# Altium PCB PCB1.PcbDoc (part 1 of 2)
Units mm, origin at the board's own origin, x right, y up, seen from the top; angles counter-clockwise.
Board outline 55 x 45 mm, 2 copper layers (Top Layer, Bottom Layer); 82 components, 65 nets, 333 pads, 91 vias.
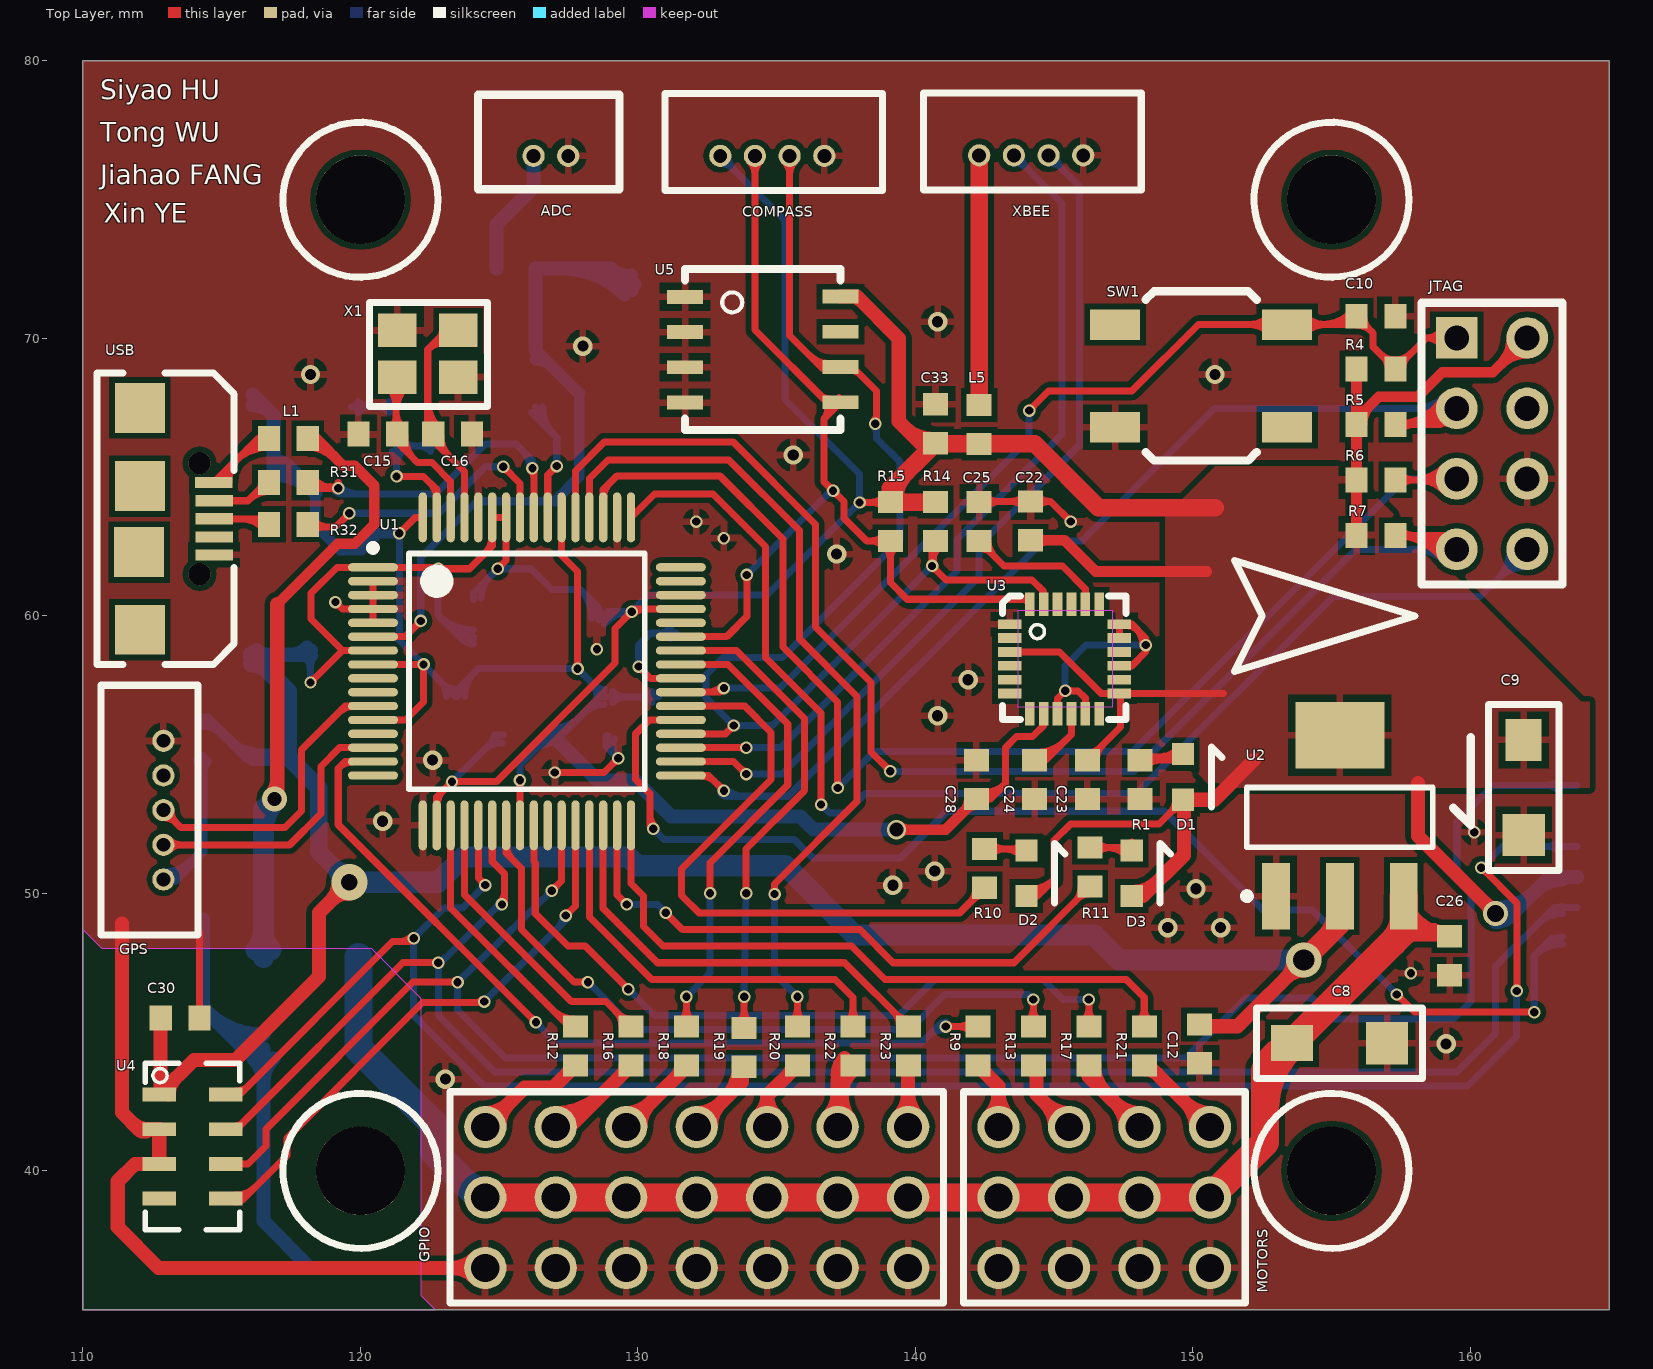
[diagram p0: Top Layer view]
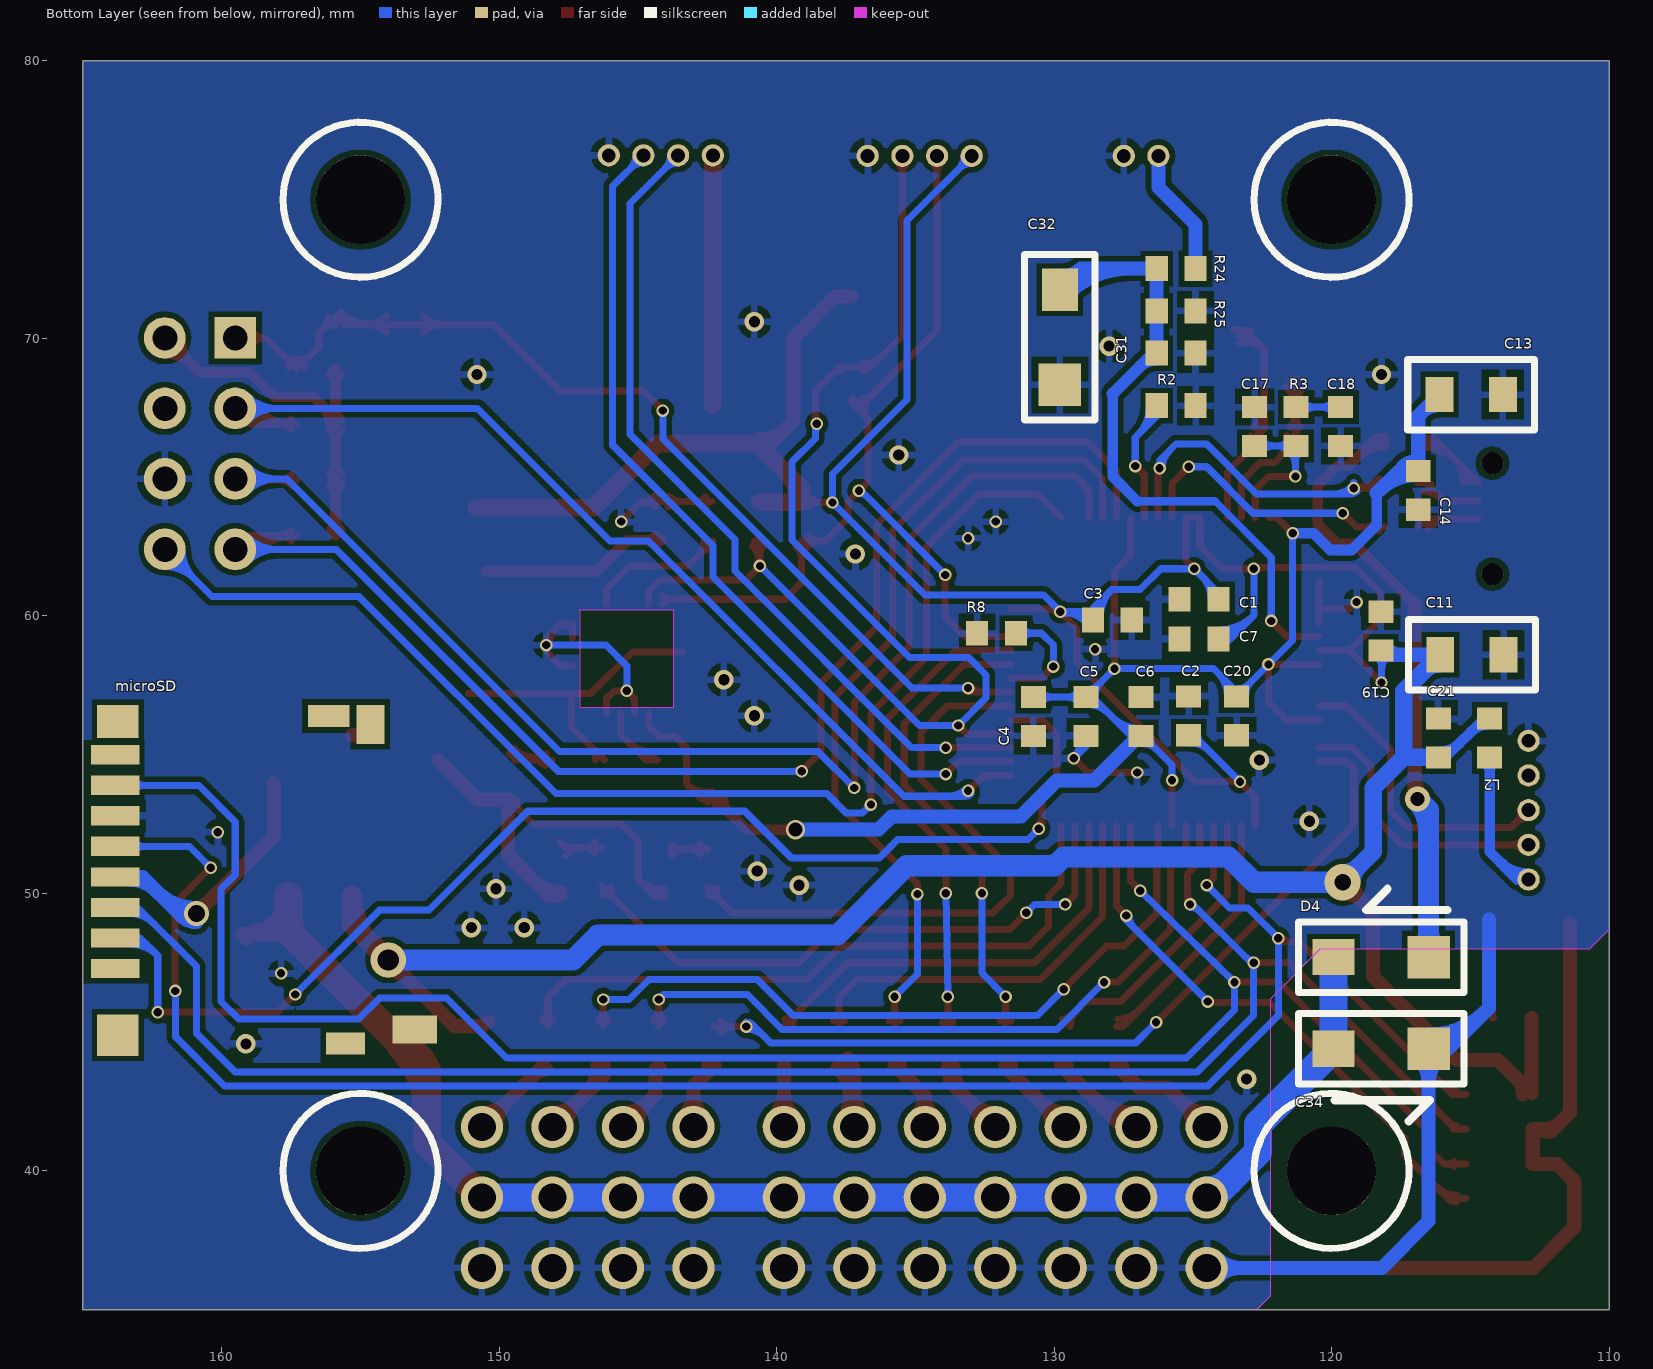
[diagram p1: Bottom Layer view, seen from below]

## Layer stack, top to bottom
Top Solder: solder mask 0.0102, Solder Resist, Dk 3.5
Top Layer: signal copper 0.0356
Dielectric 1: dielectric 0.32, FR-4, Dk 4.8
Bottom Layer: signal copper 0.0356
Bottom Solder: solder mask 0.0102, Solder Resist, Dk 3.5

## Board outline
110,35 110,80 165,80 165,35

## Design rules (kind name [scope] priority, off if disabled: settings)
Clearance [All] p1: gap=0.2
PlaneClearance [All] p1: clearance=0.1
PlaneConnect [All] p1: planeconnectstyle=Relief reliefexpansion=0.508 reliefentries=4 reliefconductorwidth=0.5 reliefairgap=0.254
PolygonConnect [All] p1: connectstyle=Relief reliefconductorwidth=0.254 reliefentries=4 polygonreliefangle="90 Angle" airgapwidth=0.254
RoutingVias [All] p1: holewidth=0.711 width=1.27 viastyle="Through Hole" minholewidth=0.711 minwidth=1.27 maxholewidth=0.711 maxwidth=1.27
SolderMaskExpansion [All] p1: expansion=0.102
Width [All] p1: maxlimit=1.27 minlimit=0.254 preferedwidth=0.254
27 further rules are at their usual default settings.

## Components (designator, comment, footprint, x,y, rotation, side; value= is the part's Value field where it differs from the comment)
ADC "AD_Port" AD 126.238,76.581 r0 top (schematic designator P10)
C1 "0.1u" 1608[0603] 124.775,60.6 r180 bottom
C2 "0.1u" 1608[0603] 125.15,56.4 r270 bottom
C3 "0.1u" 1608[0603] 127.9,59.85 r0 bottom
C4 "0.1u" 1608[0603] 130.75,56.375 r90 bottom
C5 "0.1u" 1608[0603] 128.85,56.375 r90 bottom
C6 "0.1u" 1608[0603] 126.875,56.375 r270 bottom
C7 "0.1u" 1608[0603] 124.775,59.175 r180 bottom
C8 "10u" 1206 157,44.6 r180 top
C9 "10u" 1206 161.925,52.1 r90 top
C10 "0.01u" 1608[0603] 156.6,70.8 r180 top
C11 "2.2u" 0805 113.8,58.6 r0 bottom
C12 "1n" 1608[0603] 150.241,44.577 r90 top
C13 "4.7u" 0805 113.825,67.975 r0 bottom
C14 "0.1u" 1608[0603] 116.875,64.525 r90 bottom
C15 "8p" 1608[0603] 120.625,66.55 r0 top
C16 "8p" 1608[0603] 123.325,66.55 r180 top
C17 "1n" 1608[0603] 122.775,66.825 r270 bottom
C18 "10n" 1608[0603] 119.675,66.825 r90 bottom
C19 "0.1u" 1608[0603] 118.225,59.45 r270 bottom
C20 "0.1u" 1608[0603] 123.425,56.4 r90 bottom
C21 "1u" 1608[0603] 116.15,55.6 r270 bottom
C22 "1u" 1608[0603] 144.15,63.425 r270 top
C23 "0.1u" 1608[0603] 146.2,54.1 r90 top
C24 "0.1u" 1608[0603] 144.3,54.1 r90 top
C25 "2.2n" 1608[0603] 142.3,63.4 r270 top
C26 "0.1u" 1608[0603] 159.258,47.752 r90 top
C28 "10n" 1608[0603] 142.2,54.1 r270 top
C30 "100n" 1608[0603] 113.5,45.5 r180 top
C31 "0.1u" 1608[0603] 125.603,69.469 r0 bottom
C32 "10u" 1206 129.794,68.326 r90 bottom
C33 "1u" 1608[0603] 140.725,66.925 r270 top
C34 "10u" 1206 116.5,44.4 r0 bottom
COMPASS "COMPASS" Compass 132.969,76.581 r0 top (schematic designator P4)
D1 "LED" LED 149.65,53.375 r90 top
D2 "LED" LED 144,49.9 r90 top
D3 "LED" LED 147.8,49.9 r90 top
D4 "Diode" 1206 116.5,47.7 r0 bottom
GPIO "3*7 PWMin" HEADER3X7 124.5,36.5 r0 top (schematic designator P6)
GPS "GPS" "new GPS 1.25x5" 112.9,50.5 r90 top (schematic designator P3)
JTAG "JTAG" JTAG2 159.512,70.02 r0 top (schematic designator P5)
L1 "Ferrite" 1608[0603] 117.4,66.4 r0 top
L2 "Ferrite" 1608[0603] 114.3,55.6 r90 bottom
L5 "Ferrite" 1608[0603] 142.3,66.9 r270 top
microSD "SD Connector" SD_Connector 162.941,54.991 r90 bottom (schematic designator P6)
MOTORS "3*4P PWMout" header3x4 143,36.5 r0 top (schematic designator P7)
R1 "1K" 1608[0603] 148.1,54.1 r90 top
R2 "10K" 1608[0603] 125.6,67.575 r0 bottom
R3 "1.5K" 1608[0603] 121.275,66.825 r270 bottom
R4 "47K" 1608[0603] 156.6,68.9 r180 top
R5 "10K" 1608[0603] 156.6,66.9 r180 top
R6 "10K" 1608[0603] 156.6,64.9 r180 top
R7 "10K" 1608[0603] 156.6,62.9 r180 top
R8 "10K" 1608[0603] 132.075,59.375 r180 bottom
R9 "1K" 1608[0603] 142.25,44.5 r270 top
R10 "270R" 1608[0603] 142.5,50.9 r90 top
R11 "270R" 1608[0603] 146.3,50.95 r90 top
R12 "220" 1608[0603] 127.75,44.5 r270 top
R13 "1K" 1608[0603] 144.25,44.5 r270 top
R14 "47K" 1608[0603] 140.725,63.4 r270 top
R15 "47K" 1608[0603] 139.1,63.4 r270 top
R16 "220" 1608[0603] 129.75,44.5 r270 top
R17 "1K" 1608[0603] 146.25,44.5 r270 top
R18 "220" 1608[0603] 131.75,44.5 r270 top
R19 "220" 1608[0603] 133.83,44.45 r270 top
R20 "220" 1608[0603] 135.75,44.5 r270 top
R21 "1K" 1608[0603] 148.25,44.5 r270 top
R22 "220" 1608[0603] 137.75,44.5 r270 top
R23 "220" 1608[0603] 139.75,44.5 r270 top
R24 "200K" 1608[0603] 125.603,72.517 r180 bottom
R25 "470K" 1608[0603] 125.603,70.993 r0 bottom
R31 "22R" 1608[0603] 117.4,64.8 r0 top
R32 "22R" 1608[0603] 117.4,63.3 r0 top
SW1 "Push Button" switch 154.3,71 r180 top
U1 "AT91SAM7S256-AU-001" LQFP64_N 126,58 r0 top
U2 "LM1117N33" SOT230P700X180-4N 155.3,52.8 r90 top
U3 "MPU9150" LGANEW 143.4,59.7 r0 top
U4 "MS5611" MS_5611 112.75,42.75 r0 top
U5 "EEPROM" EEPROM 131.7,71.5 r270 top
USB "USB_Receptacle" micro_usb 114.2,61.5 r0 top (schematic designator P1)
X1 "" OSC2 121.325,70.3 r0 top
XBEE "XBEE" Compass 142.3,76.6 r0 top (schematic designator P2)

## Footprints (in the part's own frame and the unit in brackets; to place one, negate y for a bottom-side part, rotate by r counter-clockwise, add the part's x,y. Pads: shape width x height; smd on the part's side, far side on the other; paste and mask are expansions set on the pad)
0805 [mm]
  rect 1x1.27 smd: 1(0,0) 2(2.286,0)
  silkscreen extent -1.14,-1.27 3.43,1.27
1206 [mil]
  rect 60x60 smd: 1(0,0)
  rect 60x51.18 smd: 2(135,0)
  silkscreen extent -50,-50 185,50
1608[0603] [mm] "Chip Capacitor, Body 1.6x0.8mm, IPC High Density"
  rect 0.8x0.9 smd: 1(-0.7,0) 2(0.7,0)
  body extent -0.87,-0.48 0.87,0.48, height 1.3
AD [mm]
  round 0.8 hole 0.5: 1(0,0) 2(1.25,0)
  silkscreen extent -2,-1.2 3.1,2.2
Compass [mm]
  round 0.8 hole 0.5: 1(0,0) 2(1.25,0) 3(2.5,0) 4(3.75,0)
  silkscreen extent -2,-1.25 5.84,2.25
EEPROM [mm]
  rect 0.5x1.3 smd: 1(0,0) 2(1.27,0) 3(2.54,0) 4(3.81,0) 5(3.8,5.6) 6(2.53,5.6) 7(1.26,5.6) 8(-0.01,5.6)
  silkscreen extent -1,0 4.8,5.6
header3x4 [mil]
  round 60 hole 40: 1(0,0) 2(0,100) 3(0,200) 4(100,0) 5(100,100) 6(100,200) 7(200,0) 8(200,100) 9(200,200) 10(300,0) 11(300,100) 12(300,200)
  silkscreen extent -50,-50 350,250
HEADER3X7 [mil]
  round 60 hole 40: 1(0,0) 2(0,100) 3(0,200) 4(100,0) 5(100,100) 6(100,200) 7(200,0) 8(200,100) 9(200,200) 10(300,0) 11(300,100) 12(300,200) 13(400,0) 14(400,100) 15(400,200) 16(500,0) 17(500,100) 18(500,200) 19(600,0) 20(600,100) 21(600,200)
  silkscreen extent -50,-50 650,250
JTAG2 [mm]
  rect 1.5x1.5 hole 0.9: 1(0,0)
  round 1.5 hole 0.9: 2(0,-2.54) 3(0,-5.08) 4(0,-7.62) 5(2.54,0) 6(2.54,-2.54) 7(2.54,-5.08) 8(2.54,-7.62)
  silkscreen extent -1.27,-8.89 3.81,1.27
LED [mm]
  rect 0.8x0.8 smd: 1(0,0) 2(1.65,0)
  silkscreen extent -0.25,-1.4 1.91,-1.02
LGANEW [mm]
  rect 0.85x0.35 smd mask+0: 1(0,0) 2(0,-0.5) 3(0,-1) 4(0,-1.5) 5(0,-2) 6(0,-2.5) 13(3.95,-2.5) 14(3.95,-2) 15(3.95,-1.5) 16(3.95,-1) 17(3.95,-0.5) 18(3.95,0)
  rect 0.35x0.85 smd mask+0: 7(0.725,-3.225) 8(1.225,-3.225) 9(1.725,-3.225) 10(2.225,-3.225) 11(2.725,-3.225) 12(3.225,-3.225) 19(3.225,0.725) 20(2.725,0.725) 21(2.225,0.725) 22(1.725,0.725) 23(1.225,0.725) 24(0.725,0.725)
  silkscreen extent -0.25,-3.43 4.19,1.02
LQFP64_N [mm] "Thin QFP, 64-Leads, Body 10x10mm, Pitch 0.5mm, IPC Medium Density"
  oval 1.8x0.3 smd: 1(-5.55,3.75) 2(-5.55,3.25) 3(-5.55,2.75) 4(-5.55,2.25) 5(-5.55,1.75) 6(-5.55,1.25) 7(-5.55,0.75) 8(-5.55,0.25) 9(-5.55,-0.25) 10(-5.55,-0.75) 11(-5.55,-1.25) 12(-5.55,-1.75) 13(-5.55,-2.25) 14(-5.55,-2.75) 15(-5.55,-3.25) 16(-5.55,-3.75) 33(5.55,-3.75) 34(5.55,-3.25) 35(5.55,-2.75) 36(5.55,-2.25) 37(5.55,-1.75) 38(5.55,-1.25) 39(5.55,-0.75) 40(5.55,-0.25) 41(5.55,0.25) 42(5.55,0.75) 43(5.55,1.25) 44(5.55,1.75) 45(5.55,2.25) 46(5.55,2.75) 47(5.55,3.25) 48(5.55,3.75)
  oval 0.3x1.8 smd: 17(-3.75,-5.55) 18(-3.25,-5.55) 19(-2.75,-5.55) 20(-2.25,-5.55) 21(-1.75,-5.55) 22(-1.25,-5.55) 23(-0.75,-5.55) 24(-0.25,-5.55) 25(0.25,-5.55) 26(0.75,-5.55) 27(1.25,-5.55) 28(1.75,-5.55) 29(2.25,-5.55) 30(2.75,-5.55) 31(3.25,-5.55) 32(3.75,-5.55) 49(3.75,5.55) 50(3.25,5.55) 51(2.75,5.55) 52(2.25,5.55) 53(1.75,5.55) 54(1.25,5.55) 55(0.75,5.55) 56(0.25,5.55) 57(-0.25,5.55) 58(-0.75,5.55) 59(-1.25,5.55) 60(-1.75,5.55) 61(-2.25,5.55) 62(-2.75,5.55) 63(-3.25,5.55) 64(-3.75,5.55)
  silkscreen extent -5.67,-4.25 4.25,4.57, body extent -5,-5 5,5, height 1.6
micro_usb [mm]
  rect 1.35x0.4 smd: 1(0.508,3.302) 2(0.525,2.65) 3(0.525,2) 4(0.525,1.35) 5(0.525,0.7)
  rect 1.8x1.8 smd: 6(-2.175,0.8) 6(-2.15,-2) 6(-2.15,3.175) 6(-2.15,6)
  round 0.8 hole 0.8: 18(0,0) 19(0,4)
  silkscreen extent -3.7,-3.25 1.25,7.25
MS_5611 [mm]
  rect 1.2x0.5 smd: 1(0,0) 2(0,-1.25) 3(0,-2.5) 4(0,-3.75) 5(2.4,-3.75) 6(2.4,-2.5) 7(2.4,-1.25) 8(2.4,0)
  silkscreen extent -0.5,-4.88 2.9,1.13
"new GPS 1.25x5" [mm]
  round 0.8 hole 0.5: 1(0,0) 2(1.25,0) 3(2.5,0) 4(5,0) 5(3.75,0)
  silkscreen extent -2,-1.25 7,2.25
OSC2 [mm]
  rect 1.4x1.2 smd: 1(0,-1.7) 2(2.2,-1.7) 3(2.2,0) 4(0,0)
  silkscreen extent -1,-2.75 3.25,1
SD_Connector [mm]
  rect 0.7x1.75 smd: 1(-6.6,0.9) 2(-5.5,0.9) 3(-4.4,0.9) 4(-3.3,0.9) 5(-2.2,0.9) 6(-1.1,0.9) 7(-7.7,0.9) 7(0,0.9)
  rect 0.8x1.4 smd: 7(-10.4,-7.4)
  rect 1.5x1.5 smd: 7(-10.1,0.8)
  rect 1x1.6 smd: 7(-9.9,-9.9)
  rect 1.4x1 smd: 7(1.1,-8.3)
  rect 1.2x1.5 smd: 7(1.2,0.8)
  rect 0.8x1.5 smd: 7(1.4,-6.8)
SOT230P700X180-4N [mm] "SOT223, 4-Leads, Body 6.50x7.00mm (avg), Pitch 2.30mm, IPC Medium Density"
  rect 2.4x1 smd: 1(-2.9,2.3) 2(-2.9,0) 3(-2.9,-2.3)
  rect 2.4x3.2 smd: 4(2.9,0)
  silkscreen extent -3.02,-3.35 1.02,3.47, body extent -1.85,-3.35 1.85,3.35, height 1.8
switch [mm]
  rect 1.8x1.1 smd: 1(0.9,4.2) 2(7.1,4.2) 3(0.9,0.5) 4(7.1,0.5)
  silkscreen extent 2,-0.7 6,5.4

## Part data
C1 C2 C3 C4 C5 C6 C7 C10 C12 C14 C15 C16 C17 C18 C19 C20 C21 C22 C23 C24 C25 C28 C30 C31 C33: library part "Cap 0603", "0603 Capacitor"
C8 C9 C26 C32 C34: library part "Cap 1206", "1206 Capacitor"
C11 C13: library part "Cap 0805", "0805 Capacitor"
COMPASS GPS XBEE: "Header, 4-Pin"
D1 D2 D3: "Typical RED, GREEN, YELLOW, AMBER GaAs LED"
D4: "Default Diode"
GPIO: library part MyPWMin
JTAG: library part JTAG2
L1: library part Inductor, "Inductor"
MOTORS: library part MyPWMout
R1 R2 R3 R4 R5 R6 R7 R8 R9 R10 R11 R12 R13 R14 R15 R16 R17 R18 R19 R20 R21 R22 R23 R24 R25 R31 R32: library part "Res 0603", "Resistor"
U1: "AT91 ARM Thumb-based 32-bit Microcontroller, 256KB Flash, 64KB SRAM, 64-Pin LQFP, 11-ch. PDC, Industrial Grade (-40癈 to 85癈), Pb-Free"
U2: library part LM1117S33, "3.3V Regulator"
U5: library part ROM
X1: library part OSC2

## Free pads (board coordinates)
  round 3.2 hole 3.2: 1(155,40) 2(155,75) 3(120,40) 4(120,75)

## Via types
v1: diameter 0.45, hole 0.3, Top Layer to Bottom Layer, 69 vias
v2: diameter 0.7, hole 0.4, Top Layer to Bottom Layer, 17 vias
v3: diameter 1.27, hole 0.762, Top Layer to Bottom Layer, 1 vias
v4: diameter 1.3, hole 0.6, Top Layer to Bottom Layer, 1 vias
v5: diameter 0.9, hole 0.5, Top Layer to Bottom Layer, 1 vias
v6: diameter 0.9, hole 0.6, Top Layer to Bottom Layer, 1 vias
v7: diameter 0.7, hole 0.5, Top Layer to Bottom Layer, 1 vias

## Nets (pads, with @x,y where several pads share a name; then routed paths per layer and width w, separated by ;. In a path a pad name is that pad's centre, name@x,y a point inside that pad or via, vN(x,y) a via of type N, cw(c..) or ccw(c..) an arc to the next point about the centre after c; other vN are vias at no path point)
3.3V: C1.2 C2.2 C3.2 C7.2 C9.2 C11.2 C12.2 C19.2 C21.2 C22.2 C23.2 C30.2 C33.2 COMPASS.1 D1.1 D2.1 D3.1 JTAG.5 L2.2 L5.2 microSD.3 R4.2 R5.2 R6.2 R7.2 R14.1 R15.1 U1.1 U1.7 U1.18 U1.45 U1.58 U1.59 U2.2 U2.4 U3.3 U3.13 U4.1 U5.8 | length 272.2
  Top Layer w0.254: v1(118.2,57.6) 119.35,58.75 ; v1@118.2,57.698 ccw(c118.2,57.935) 118.367,57.767 ccw(c118.535,57.6) v1@118.298,57.6 ; U1.7@120.45,58.75 119.35,58.75 ; 122.443,61.75 cw(c122.443,61.343) v1@122.731,61.631 ; U1.18@122.75,52.45 122.75,53.475 v1(123.3,54.025) 124.9,54.025 129.175,58.3 129.175,59.55 v1(129.775,60.15) 129.875,60.25 U1.45@131.55,60.25 ; U1.18@122.773,53.2 cw(c123.492,53.2) 122.984,53.709 ; v1@122.869,61.631 cw(c123.037,61.463) 123.037,61.7 cw(c123.037,61.937) v1@122.869,61.769 ; v1@123.202,54.025 cw(c122.965,54.025) 123.133,53.858 cw(c123.3,53.69) v1@123.3,53.927 ; v1@123.369,53.956 cw(c123.537,53.788) 123.537,54.025 cw(c123.537,54.262) v1@123.369,54.094 ; 124.516,62.291 ccw(c124.008,62.8) U1.59@124.727,62.8 ; v1(124.95,61.7) 125.25,62 U1.58@125.25,63.55 U1.59@124.75,63.55 124.75,62.525 123.925,61.7 v1(122.8,61.7) 122.75,61.75 U1.1@120.45,61.75 119.15,61.75 118.217,60.817 118.217,59.883 119.35,58.75 ; v1@124.95,61.798 ccw(c124.95,62.035) 125.117,61.867 ccw(c125.285,61.7) v1@125.048,61.7 ; v1@129.677,60.15 cw(c129.44,60.15) 129.608,59.983 cw(c129.775,59.815) v1@129.775,60.052 ; v1@129.844,60.081 cw(c130.253,59.672) 130.253,60.25 ; v1(137.988,64.087) R15.1@139.088,64.087 ; v1@138.057,64.018 cw(c138.224,63.851) 138.224,64.087 cw(c138.224,64.324) v1@138.057,64.157 ; 138.361,64.087 ccw(c138.361,64.789) R15.1@138.857,64.293 ; 138.421,64.087 cw(c138.421,63.471) R15.1@138.857,63.907 ; U3.3@143.4,58.7 145.2,58.7 146.7,57.2 U3.13@147.35,57.2 ; D2.1@144,49.9 144.4,49.9 145,50.5 ; D2.1@144.002,49.919 ccw(c144.099,50.67) 144.634,50.134 ; D2.1@144.035,50.171 ccw(c144.182,51.318) 145,50.5 ; C23.2@146.2,54.8 147.4,56 147.4,57.15 U3.13@147.35,57.2 ; C23.2@146.25,55.073 ccw(c146.25,55.611) 146.631,55.231 ; C23.2@146.523,54.8 cw(c147.303,54.8) 146.751,55.351 ; U3.13@147.316,57.166 cw(c147.113,56.963) 147.4,56.963 ; D1.1@149.377,53.375 cw(c148.718,53.375) 149.184,52.909 cw(c149.65,52.443) D1.1@149.65,53.102 ; D1.1@149.65,53.375 148.775,52.5 145.6,52.5 145,51.9 145,50.5 ; 151.1,57.2 U3.13@147.35,57.2
  Top Layer w0.381: C22.2@144.15,62.725 145.375,62.725 146.5,61.6 150.5,61.6 ; C22.2@144.348,62.577 cw(c144.706,62.219) 144.706,62.725 cw(c144.706,63.231) C22.2@144.348,62.873 ; R7.2@155.752,63.098 ccw(c155.394,63.456) 155.9,63.456 ccw(c156.406,63.456) R7.2@156.048,63.098 ; R6.2@155.752,64.702 cw(c155.394,64.344) 155.9,64.344 cw(c156.406,64.344) R6.2@156.048,64.702 ; R6.2@155.752,65.098 ccw(c155.394,65.456) 155.9,65.456 ccw(c156.406,65.456) R6.2@156.048,65.098 ; R5.2@155.752,66.702 cw(c155.394,66.344) 155.9,66.344 cw(c156.406,66.344) R5.2@156.048,66.702 ; R5.2@155.752,67.098 ccw(c155.394,67.456) 155.9,67.456 ccw(c156.406,67.456) R5.2@156.048,67.098 ; R4.2@155.752,68.702 cw(c155.394,68.344) 155.9,68.344 cw(c156.406,68.344) R4.2@156.048,68.702 ; R7.2@155.9,62.9 R6.2@155.9,64.9 R5.2@155.9,66.9 R5.2@155.9,67.1 ; R4.2@155.9,68.9 R5.2@155.9,67.1 ; R5.2@156.109,66.95 cw(c156.977,66.95) 156.364,67.564 ; JTAG.5@161.493,70.02 cw(c160.142,70.02) 161.097,69.065 cw(c162.052,68.11) JTAG.5@162.052,69.461 ; JTAG.5@162.052,70.02 160.816,68.784 158.984,68.784 158.1,67.9 156.7,67.9 R5.2@155.9,67.1
  Top Layer w0.508: C30.2@112.8,45.5 112.8,42.8 114,44 115.5,44 118.5,47 118.5,49.3 v4(119.6,50.4) ; U4.1@113.096,42.75 cw(c113.931,42.75) 113.341,43.341 ; v4@119.204,50.4 cw(c118.248,50.4) 118.924,49.724 cw(c119.6,49.048) v4@119.6,50.004 ; U5.8@137.3,71.51 137.89,71.51 139.4,70 139.4,67 140.175,66.225 C33.2@140.725,66.225 ; U5.8@137.7,71.514 cw(c137.7,71.065) 138.018,71.382 ; 139.572,66.828 ccw(c140.675,67.93) C33.2@140.675,66.371 ; D3.1@147.8,49.9 148.2,49.9 149.675,51.375 D1.1@149.675,53.375 ; D3.1@147.8,50.046 ccw(c147.8,51.364) 148.732,50.432 ; D1.1@149.547,53.272 cw(c149.237,52.962) 149.675,52.962 ; D1.1@149.65,53.375 D1.1@149.675,53.375 ; C12.2@150.394,45.38 ccw(c150.8,45.786) 150.8,45.212 ; C12.2@150.6,45.212 151.612,45.212 v3(154,47.6) ; 152.2,54.8 150.775,53.375 D1.1@149.675,53.375 ; v3@153.619,47.6 cw(c152.699,47.6) 153.35,46.95 cw(c154,46.299) v3@154,47.219 ; U2.4@154.8,55.7 U2.4@155.3,55.7 ; 158.115,53.975 158.115,52.07 v6(160.909,49.276) ; v6@160.713,49.276 ccw(c160.24,49.276) 160.574,49.611 ccw(c160.909,49.945) v6@160.909,49.472
  Top Layer w0.635: R15.1@139.233,64.1 cw(c140.759,64.1) 139.68,65.18 ; R14.1@140.6,64.1 R15.1@139.1,64.1 139.1,64.6 C33.2@140.725,66.225 ; C33.2@140.75,66.2 L5.2@142.3,66.2 144.3,66.2 146.6,63.9 150.8,63.9
  Top Layer w0.762: v3(154,47.6) 155.3,48.9 U2.2@155.3,49.9 ; 154.885,48.485 ccw(c154.169,49.2) U2.2@155.181,49.2
  Bottom Layer w0.254: C19.2@117.982,58.557 cw(c117.456,58.031) 118.2,58.031 ; v1@118.131,57.669 ccw(c117.963,57.837) 118.2,57.837 ccw(c118.437,57.837) v1@118.269,57.669 ; v1(118.2,57.6) C19.2@118.2,58.475 ; 118.2,58.151 cw(c118.774,58.151) C19.2@118.368,58.557 ; v1@122.731,61.631 cw(c122.563,61.463) 122.8,61.463 cw(c123.037,61.463) v1@122.869,61.631 ; v1(122.8,61.7) 122.8,60.025 ; 123.233,59.592 ccw(c124.073,60.433) C7.2@124.075,59.244 ; v1(123.3,54.025) 124.975,55.7 C2.2@125.15,55.7 ; v1@123.3,54.123 ccw(c123.3,54.36) 123.467,54.192 ccw(c123.635,54.025) v1@123.398,54.025 ; 123.666,59.159 ccw(c124.075,59.568) C7.2@124.075,58.99 ; C7.2@123.827,59.062 ccw(c123.65,58.981) 123.65,59.175 ; C7.2@123.827,59.288 cw(c123.65,59.369) 123.65,59.175 ; C7.2@124.075,59.175 123.65,59.175 ; C7.2@124.075,59.498 cw(c124.072,61.297) 122.8,60.025 ; C1.2@124.075,60.6 124.075,60.825 v1(124.95,61.7) 126.15,61.7 126.9,60.95 127.925,60.95 ; C1.2@124.348,60.65 cw(c125.429,60.65) 124.665,61.415 ; 124.421,55.146 cw(c125.1,54.466) C2.2@125.1,55.427 ; C2.2@124.722,55.447 ccw(c124.47,55.7) C2.2@124.827,55.7 ; v1@124.852,61.7 cw(c124.615,61.7) 124.783,61.533 cw(c124.95,61.365) v1@124.95,61.602 ; v1@125.019,61.631 cw(c125.187,61.463) 125.187,61.7 cw(c125.187,61.937) v1@125.019,61.769 ; C3.2@128.327,59.912 ccw(c126.95,59.975) 127.925,60.95 ; 128.332,60.543 cw(c127.729,59.94) C3.2@128.581,59.901 ; C3.2@128.614,59.887 cw(c129.204,59.356) 129.204,60.15 ; C3.2@128.803,59.717 cw(c129.775,58.842) v1@129.775,60.15 ; v1@129.69,60.199 cw(c129.485,60.317) 129.547,60.089 cw(c129.608,59.86) v1@129.726,60.065 ; v1@129.706,60.081 ccw(c129.538,59.913) 129.538,60.15 ccw(c129.538,60.387) v1@129.706,60.219 ; v1@129.775,60.248 ccw(c129.775,60.485) 129.942,60.317 ccw(c130.11,60.15) v1@129.873,60.15 ; COMPASS.1@132.969,76.308 cw(c132.969,75.649) 133.435,76.115 cw(c133.901,76.581) COMPASS.1@133.242,76.581 ; COMPASS.1@132.969,76.581 135.3,74.25 135.3,67.8 137.988,65.112 v1(137.988,64.087) 134.65,60.75 130.375,60.75 v1(129.775,60.15) ; v1@137.89,64.087 cw(c137.653,64.087) 137.82,63.92 cw(c137.988,63.753) v1@137.988,63.989 ; v1@137.918,64.157 ccw(c137.751,64.324) 137.988,64.324 ccw(c138.224,64.324) v1@138.057,64.157 ; 122.8,60.025 123.65,59.175 ; 127.925,60.95 128.6,60.275 C3.2@128.6,59.85 128.9,60.15 v1(129.775,60.15)
  Bottom Layer w0.381: L2.2@114.3,56.3 114.5,56.3 115.9,54.9 C21.2@116.15,54.9 ; L2.2@114.35,56.091 cw(c114.35,55.223) 114.964,55.836 ; 115.401,55.399 ccw(c116.1,56.098) C21.2@116.1,55.109
  Bottom Layer w0.508: C11.2@116.086,58.6 118.075,58.6 C19.2@118.225,58.75 ; C11.2@116.26,58.426 cw(c116.68,58.006) 116.68,58.6 cw(c116.68,59.194) C11.2@116.26,58.774 ; 117.46,58.6 ccw(c117.46,59.465) C19.2@118.072,58.853 ; v6@160.909,48.964 ccw(c160.909,49.744) 161.46,49.192 ; v6@160.909,49.472 ccw(c160.909,51.478) 162.328,50.06 ; v6@161.048,49.137 cw(c161.535,48.65) 161.535,49.34 ; v6@161.226,49.34 161.607,49.34 162.859,50.591 microSD.3@163.841,50.591 ; 162.372,50.104 cw(c163.316,49.16) microSD.3@163.316,50.495
  Bottom Layer w0.635: C11.2@116.086,58.282 cw(c116.086,57.516) 116.628,58.058 ; C11.2@116.086,58.6 117.4,57.286 117.4,54.9 ; C21.2@116.15,54.9 117.4,54.9 ; v4@119.268,50.4 ccw(c118.465,50.4) 119.032,50.968 ccw(c119.6,51.535) v4@119.6,50.732 ; v4(119.6,50.4) 118.5,51.5 118.5,53.8 117.4,54.9
  Bottom Layer w0.762: v4(119.6,50.4) 122.8,50.4 123.708,51.308 129.667,51.308 129.98,50.995 135.314,50.995 137.809,48.5 146.445,48.5 147.345,47.6 v3(154,47.6)
5V: C8.2 C26.2 C34.2 D4.2 GPIO.2 GPIO.5 GPIO.8 GPIO.11 GPIO.14 GPIO.17 GPIO.20 MOTORS.2 MOTORS.5 MOTORS.8 MOTORS.11 U2.3 | length 88.2
  Top Layer w0.508: U2.3@157.378,49.062 ccw(c158.343,49.663) 158.343,48.525 ; 157.704,48.525 159.258,48.525 cw(c159.258,50.232) U2.3@157.809,49.33 ; 158.679,48.525 cw(c158.679,47.923) C26.2@159.105,48.349 ; 158.695,48.676 cw(c158.53,48.06) C26.2@159.082,48.379
  Top Layer w1.016: GPIO.2@124.5,39.04 GPIO.5@127.04,39.04 GPIO.8@129.58,39.04 GPIO.11@132.12,39.04 GPIO.14@134.66,39.04 GPIO.17@137.2,39.04 GPIO.20@139.74,39.04 MOTORS.2@143,39.04 MOTORS.5@145.54,39.04 MOTORS.8@148.08,39.04 MOTORS.11@150.62,39.04 152.6,41.02 152.6,43.629 C8.2@153.571,44.6 157.6,48.629 U2.3@157.6,49.9 ; 152.6,42.183 cw(c155.876,42.183) C8.2@153.559,44.5 ; 152.6,43.304 cw(c153.798,43.304) C8.2@153.495,44.463 ; 157.21,48.239 ccw(c156.249,49.2) U2.3@157.608,49.2
  Bottom Layer w1.016: D4.2@119.929,47.7 C34.2@119.929,44.4 122.65,41.679 122.65,40.675 124.285,39.04 GPIO.2@124.5,39.04 GPIO.5@127.04,39.04 GPIO.8@129.58,39.04 GPIO.11@132.12,39.04 GPIO.14@134.66,39.04 GPIO.17@137.2,39.04 GPIO.20@139.74,39.04 MOTORS.2@143,39.04 MOTORS.5@145.54,39.04 MOTORS.8@148.08,39.04 MOTORS.11@150.62,39.04 ; 123.699,39.626 ccw(c124.5,40.426) GPIO.2@124.5,39.294
AD7: C31.2 C32.2 R24.1 R25.2 U1.6 | length 29.9
  Top Layer w0.254: U1.6@120.45,59.25 121.607,59.25 v1(122.174,59.817) ; v1@122.076,59.817 cw(c121.839,59.817) 122.007,59.65 cw(c122.174,59.482) v1@122.174,59.719
  Bottom Layer w0.254: v1@122.105,59.886 ccw(c121.937,60.054) 122.174,60.054 ccw(c122.411,60.054) v1@122.243,59.886 ; v1(122.174,59.817) 122.174,62.103 124.206,64.135
  Bottom Layer w0.305: 124.206,64.135 127,64.135
  Bottom Layer w0.381: 127,64.135 127.889,65.024 127.889,68.01
  Bottom Layer w0.432: C31.2@126.303,69.235 cw(c126.303,68.363) 126.919,68.98 ; C31.2@126.303,69.596 127.889,68.01
  Bottom Layer w0.508: C31.2@126.303,69.596 R24.1@126.303,72.517 129.032,72.517 ; 127.269,72.517 cw(c127.269,69.342) C32.2@129.514,71.587 ; 128.495,72.517 cw(c128.495,70.568) C32.2@129.873,71.946 ; C32.2@129.197,72.352 cw(c128.712,71.867) C32.2@129.398,71.867 ; C32.2@129.753,72.261 cw(c129.662,73.147) 129.032,72.517 ; C32.2@129.794,71.755 129.032,72.517
"AD PORT": ADC.1 R24.2 | length 4.6
  Bottom Layer w0.508: R24.2@124.903,72.517 124.903,74.103 126.238,75.438 ADC.1@126.238,76.581
CSB: U1.28 U4.5 | length 23.4
  Top Layer w0.254: U4.5@115.15,39 115.8,39 117.35,40.55 117.35,41.175 122.237,46.063 v1@124.422,46.063 ; U4.5@115.5,38.869 ccw(c115.5,39.277) 115.788,38.988 ; U4.5@115.5,39.123 ccw(c115.5,40.144) 116.222,39.422 ; U4.5@115.587,38.913 cw(c115.797,38.703) 115.797,39 cw(c115.797,39.297) U4.5@115.587,39.087 ; 124.13,46.063 ccw(c124.13,46.431) v1@124.391,46.17 ; v1(127.4,49.2) 127.75,49.55 U1.28@127.75,52.45 ; v1@127.4,49.298 ccw(c127.4,49.535) 127.567,49.367 ccw(c127.735,49.2) v1@127.498,49.2
  Bottom Layer w0.254: v1(124.46,46.101) 127.4,49.041 v1(127.4,49.2) ; v1@124.46,46.199 ccw(c124.46,46.436) 124.627,46.268 ccw(c124.795,46.101) v1@124.558,46.101 ; 127.12,48.761 ccw(c126.682,49.2) v1@127.302,49.2
DDM: R31.2 U1.56 | length 16.1
  Top Layer w0.254: R31.2@118.1,64.8 118.3,64.6 v1(119.2,64.6) v1@119.2,64.8 ; R31.2@118.113,64.763 ccw(c118.508,65.158) 118.508,64.6 ; R31.2@118.293,64.943 ccw(c119.121,65.771) v1@119.121,64.6 ; 118.919,64.654 ccw(c118.998,64.95) v1@119.151,64.685 ; v1@119.131,64.531 ccw(c118.963,64.363) 118.963,64.6 ccw(c118.963,64.837) v1@119.131,64.669 ; v1@126.131,65.256 cw(c125.843,64.968) 126.25,64.968 ; v1(126.2,65.325) 126.25,65.275 U1.56@126.25,63.55
  Bottom Layer w0.254: v1@119.09,64.49 ccw(c119.306,64.706) 119.306,64.4 ; v1@119.2,64.8 v1(119.2,64.6) 119.4,64.4 122.7,64.4 124.5,66.2 125.6,66.2 126.2,65.6 v1(126.2,65.325) ; v1@119.269,64.669 ccw(c119.919,65.319) 119.919,64.4 ; 125.838,65.962 cw(c125.202,65.325) v1@126.102,65.325 ; v1@126.131,65.394 ccw(c125.963,65.562) 126.2,65.562 ccw(c126.437,65.562) v1@126.269,65.394
DDP: R32.2 U1.57 | length 12.5
  Top Layer w0.254: R32.2@118.1,63.2 119.1,63.2 v1(119.6,63.7) ; R32.2@118.293,63.057 cw(c118.638,62.712) 118.638,63.2 ; R32.2@118.293,63.443 ccw(c118.88,64.03) 118.88,63.2 ; v1@119.502,63.7 cw(c119.265,63.7) 119.433,63.533 cw(c119.6,63.365) v1@119.6,63.602 ; v1@125.15,65.277 cw(c125.15,65.04) 125.317,65.208 cw(c125.485,65.375) v1@125.248,65.375 ; v1(125.15,65.375) 125.75,64.775 U1.57@125.75,63.55
  Bottom Layer w0.254: v1(119.6,63.7) 122.825,63.7 124.5,65.375 v1(125.15,65.375) ; v1@119.669,63.631 cw(c119.837,63.463) 119.837,63.7 cw(c119.837,63.937) v1@119.669,63.769 ; v1@125.081,65.306 ccw(c124.913,65.138) 124.913,65.375 ccw(c124.913,65.612) v1@125.081,65.444
GND: ADC.2 C1.1 C2.1 C3.1 C4.1 C5.1 C6.1 C7.1 C8.1 C9.1 C10.1 C11.1 C12.1 C13.1 C14.1 C15.1 C16.1 C17.1 C18.1 C19.1 C20.1 C21.1 C22.1 C23.1 C24.1 C25.1 C26.1 C28.1 C30.1 C31.1 C32.1 C33.1 C34.1 COMPASS.4 GPIO.1 GPIO.4 GPIO.7 GPIO.10 GPIO.13 GPIO.16 GPIO.19 GPS.4 JTAG.7 microSD.5 MOTORS.1 MOTORS.4 MOTORS.7 MOTORS.10 R1.1 R2.1 R8.1 R25.1 SW1.2 U1.2 U1.3 U1.4 U1.5 U1.17 U1.46 U1.50 U1.60 U2.1 U3.1 U3.9 U3.11 U3.15 U3.17 U3.18 U4.2 U4.3 U5.1 U5.2 U5.3 U5.4 USB.5 X1.2 X1.4 XBEE.4 | length 91
  Top Layer w0.254: C30.1@114.173,45.527 C30.1@114.2,45.5 114.2,48.614 ; v1@119.1,60.402 cw(c119.1,60.165) 119.267,60.333 cw(c119.435,60.5) v1@119.198,60.5 ; v1(119.1,60.5) 119.35,60.25 U1.4@120.45,60.25 ; U1.5@120.45,59.75 U1.4@120.45,60.25 ; U1.2@120.45,61.25 U1.3@120.45,60.75 U1.4@120.45,60.25 ; v1(127,54.356) 128.778,54.356 v1(129.286,54.864) ; v1@127.069,54.287 cw(c127.237,54.119) 127.237,54.356 cw(c127.237,54.593) v1@127.069,54.425 ; v1@129.188,54.864 cw(c128.951,54.864) 129.119,54.697 cw(c129.286,54.529) v1@129.286,54.766 ; C25.1@142.325,64.125 C22.1@144.15,64.125 144.875,64.125 v1(145.6,63.4) ; C25.1@142.543,63.907 cw(c143.069,63.381) 143.069,64.125 ; C25.1@142.543,64.293 ccw(c142.949,64.699) 142.949,64.125 ; C22.1@143.907,63.932 ccw(c143.441,63.466) 143.441,64.125 ccw(c143.441,64.784) C22.1@143.907,64.318 ; C22.1@144.393,63.932 cw(c144.859,63.466) 144.859,64.125 cw(c144.859,64.784) C22.1@144.393,64.318 ; U3.9@145.125,56.475 145.125,57.025 v1(145.4,57.3) 145.862,57.3 146.125,57.037 U3.11@146.125,56.475 ; v1@145.469,57.231 cw(c145.637,57.063) 145.637,57.3 cw(c145.637,57.537) v1@145.469,57.369 ; v1@145.502,63.4 ccw(c145.265,63.4) 145.433,63.567 ccw(c145.6,63.735) v1@145.6,63.498 ; U3.15@147.35,58.2 147.8,58.2 148.3,58.7 v1(148.3,58.95) 148.3,59.2 147.8,59.7 U3.18@147.35,59.7 U3.17@147.35,59.202 ; U3.18@147.6,59.652 cw(c147.6,59.053) 148.023,59.477 ; 147.956,59.544 cw(c147.362,58.95) v1@148.202,58.95 ; v1@148.231,58.881 cw(c148.063,58.713) 148.3,58.713 cw(c148.537,58.713) v1@148.369,58.881 ; v1@148.231,59.019 ccw(c148.063,59.187) 148.3,59.187 ccw(c148.537,59.187) v1@148.369,59.019
  Top Layer w0.508: 111.4,48.916 111.4,42.1 112,41.5 ; 111.724,41.776 ccw(c112.4,42.452) U4.2@112.4,41.496 ; U4.2@112.403,41.497 cw(c112.203,41.703) 112,41.5 ; GPIO.1@124.141,36.141 ccw(c123.274,35.274) 123.274,36.5 ccw(c123.274,37.726) GPIO.1@124.141,36.859 ; GPIO.1@124.5,36.5 112.725,36.5 111.252,37.973 111.252,39.624 111.878,40.25 U4.3@112.75,40.25 U4.2@112.75,41.5 112,41.5
  Bottom Layer w0.254: C5.1@128.85,55.675 128.85,55.3 v1(129.286,54.864) cw(c129.737,55.315) C5.1@129.151,55.567 ; C5.1@128.917,55.668 ccw(c129.367,55.475) 129.021,55.129 ; v1@129.188,54.864 ccw(c128.951,54.864) 129.119,55.031 ccw(c129.286,55.199) v1@129.286,54.962 ; v1@129.191,54.889 ccw(c128.963,54.951) 129.168,55.069 ccw(c129.373,55.187) v1@129.311,54.959 ; v1@145.331,57.369 ccw(c145.163,57.537) 145.4,57.537 ccw(c145.637,57.537) v1@145.469,57.369 ; v1(145.4,57.3) 145.4,58.2 146.15,58.95 v1(148.3,58.95) ; v1@148.231,58.881 ccw(c148.063,58.713) 148.063,58.95 ccw(c148.063,59.187) v1@148.231,59.019
  Bottom Layer w0.508: 114.325,49.047 114.325,45.872 115.798,44.4 C34.1@116.5,44.4 ; 114.434,45.764 ccw(c116.5,47.83) C34.1@116.5,44.908 ; 115.301,44.897 ccw(c116.5,46.095) C34.1@116.5,44.4 ; C34.1@116.141,44.041 cw(c115.274,43.174) 116.5,43.174 cw(c117.726,43.174) C34.1@116.859,44.041 ; GPIO.1@124.141,36.141 ccw(c123.274,35.274) 123.274,36.5 ccw(c123.274,37.726) GPIO.1@124.141,36.859 ; GPIO.1@124.5,36.5 118.186,36.5 116.5,38.186 C34.1@116.5,44.4
  other v1: 157.861,47.117 160.147,52.197 128.524,58.801 133.1,62.8 132.1,63.4
  other v2: 123.063,43.307 159.131,44.577 149.098,48.768 151.003,48.768 150.114,50.165 139.192,50.292 140.7,50.8 120.8,52.6 122.6,54.8 140.8,56.4 141.9,57.7 137.16,62.23 135.6,65.8 118.2,68.7 150.8,68.7 128.016,69.723 140.8,70.6
IN1: R12.1 U1.19 | length 10.1
  Top Layer w0.254: U1.19@123.25,52.45 123.25,49.475 127.525,45.2 R12.1@127.75,45.2 ; 126.935,45.79 ccw(c127.7,46.554) R12.1@127.7,45.473
IN2: R16.1 U1.20 | length 11.5
  Top Layer w0.254: U1.20@123.75,52.45 123.75,49.95 127.6,46.1 128.85,46.1 R16.1@129.75,45.2 ; 129.199,45.751 cw(c128.647,45.2) R16.1@129.427,45.2 ; 129.319,45.631 ccw(c129.7,46.011) R16.1@129.7,45.473
IN3: R18.1 U1.41 | length 19.7
  Top Layer w0.254: U1.41@131.55,58.25 133.25,58.25 135.4,56.1 135.4,53.9 132.6,51.1 v1(132.6,50) ; R18.1@131.557,45.393 ccw(c131.091,45.859) 131.75,45.859 ccw(c132.409,45.859) R18.1@131.943,45.393 ; v1@131.681,46.206 cw(c131.513,46.038) 131.75,46.038 cw(c131.987,46.038) v1@131.819,46.206 ; R18.1@131.75,45.2 v1(131.75,46.275) ; v1@132.531,50.069 ccw(c132.363,50.237) 132.6,50.237 ccw(c132.837,50.237) v1@132.669,50.069
  Bottom Layer w0.254: v1(131.75,46.275) 132.6,47.125 v1(132.6,50) ; v1@131.75,46.373 ccw(c131.75,46.61) 131.917,46.442 ccw(c132.085,46.275) v1@131.848,46.275 ; v1@132.531,49.931 cw(c132.363,49.763) 132.6,49.763 cw(c132.837,49.763) v1@132.669,49.931
IN4: R19.1 U1.42 | length 20
  Top Layer w0.254: U1.42@131.55,58.75 133.55,58.75 136,56.3 136,53.7 133.9,51.6 v1(133.9,50) ; R19.1@133.637,45.343 ccw(c133.171,45.809) 133.83,45.809 ccw(c134.489,45.809) R19.1@134.023,45.343 ; v1@133.761,46.201 cw(c133.593,46.033) 133.83,46.033 cw(c134.067,46.033) v1@133.899,46.201 ; R19.1@133.83,45.15 v1(133.83,46.27) ; v1@133.831,50.069 ccw(c133.663,50.237) 133.9,50.237 ccw(c134.137,50.237) v1@133.969,50.069
  Bottom Layer w0.254: v1@133.762,46.341 ccw(c133.598,46.511) 133.834,46.507 ccw(c134.071,46.502) v1@133.901,46.338 ; v1@133.829,49.932 cw(c133.659,49.768) 133.896,49.763 cw(c134.132,49.759) v1@133.968,49.929 ; v1(133.83,46.27) v1(133.9,50)
IN5: R20.1 U1.52 | length 33.1
  Top Layer w0.254: U1.52@128.25,63.55 128.25,64.95 128.925,65.625 133.275,65.625 135.825,63.075 135.825,59.175 137.9,57.1 137.9,53.318 134.925,50.343 v1(134.925,49.975) ; v1@134.856,50.044 ccw(c134.688,50.212) 134.925,50.212 ccw(c135.162,50.212) v1@134.994,50.044 ; R20.1@135.557,45.393 ccw(c135.091,45.859) 135.75,45.859 ccw(c136.409,45.859) R20.1@135.943,45.393 ; v1@135.681,46.206 cw(c135.513,46.038) 135.75,46.038 cw(c135.987,46.038) v1@135.819,46.206 ; R20.1@135.75,45.2 v1(135.75,46.275)
  Bottom Layer w0.254: v1@134.856,49.906 cw(c134.688,49.738) 134.925,49.738 cw(c135.162,49.738) v1@134.994,49.906 ; v1(134.925,49.975) 134.925,47.1 v1(135.75,46.275) ; v1@135.652,46.275 ccw(c135.415,46.275) 135.583,46.442 ccw(c135.75,46.61) v1@135.75,46.373
IN6: R22.1 U1.29 | length 16.1
  Top Layer w0.254: U1.29@128.25,52.45 128.25,49.15 130.5,46.9 137.1,46.9 137.75,46.25 R22.1@137.75,45.2 ; R22.1@137.557,45.393 ccw(c137.091,45.859) 137.75,45.859 ccw(c138.409,45.859) R22.1@137.943,45.393
IN7: R23.1 U1.30 | length 16.8
  Top Layer w0.254: U1.30@128.75,52.45 128.75,49.45 130.7,47.5 137.45,47.5 R23.1@139.75,45.2 ; 139.199,45.751 cw(c138.647,45.2) R23.1@139.427,45.2 ; 139.319,45.631 ccw(c139.7,46.011) R23.1@139.7,45.473
MISO: microSD.6 U1.27 U4.6 | length 73.1
  Top Layer w0.254: U4.6@115.15,40.25 115.95,40.25 116.6,40.9 116.6,41.5 121.9,46.8 v1(123.5,46.8) ; U4.6@115.587,40.163 cw(c115.797,39.953) 115.797,40.25 cw(c115.797,40.547) U4.6@115.587,40.337 ; v1@123.431,46.731 ccw(c123.263,46.563) 123.263,46.8 ccw(c123.263,47.037) v1@123.431,46.869 ; v1(126.9,50.1) 127.25,50.45 U1.27@127.25,52.45 ; v1@126.9,50.198 ccw(c126.9,50.435) 127.067,50.267 ccw(c127.235,50.1) v1@126.998,50.1
  Bottom Layer w0.254: v1@123.431,46.731 cw(c123.263,46.563) 123.5,46.563 cw(c123.737,46.563) v1@123.569,46.731 ; v1@123.501,46.898 ccw(c123.505,47.135) 123.67,46.965 ccw(c123.835,46.795) v1@123.598,46.799 ; v1@126.802,50.101 cw(c126.565,50.105) 126.73,49.935 cw(c126.895,49.765) v1@126.899,50.002 ; v1(126.9,50.1) v1(123.5,46.8) 123.5,45.791 125.222,44.069 149.733,44.069 151.892,46.228 154.305,46.228 155.067,45.466 159.385,45.466 160.02,46.101 160.02,50.165 159.512,50.673 159.512,52.578 160.825,53.891 microSD.6@163.841,53.891 ; microSD.6@163.158,53.733 ccw(c162.778,53.353) 162.778,53.891 ccw(c162.778,54.429) microSD.6@163.158,54.049
MOSI: microSD.2 U1.22 U4.7 | length 67.8
  Top Layer w0.254: U4.7@115.15,41.5 115.525,41.5 121.531,47.506 v1@122.801,47.506 ; U4.7@115.5,41.623 ccw(c115.5,41.98) 115.753,41.728 ; U4.7@115.623,41.5 cw(c115.86,41.5) U4.7@115.692,41.667 ; 122.553,47.506 cw(c122.553,47.242) v1@122.74,47.429 ; U1.22@124.75,52.45 124.75,51.15 125.2,50.7 125.2,49.7 v1(125.1,49.6) ; v1@125.031,49.669 ccw(c124.622,50.078) 125.2,50.078
  Bottom Layer w0.254: v1@122.74,47.429 cw(c122.572,47.261) 122.809,47.261 cw(c123.046,47.261) v1@122.878,47.429 ; v1(122.809,47.498) 122.809,45.593 124.841,43.561 159.512,43.561 160.909,44.958 160.909,47.371 163.029,49.491 microSD.2@163.841,49.491 ; v1@122.809,47.596 ccw(c122.809,48.047) 123.128,47.728 ; v1@122.854,47.453 125.1,49.7 v1(125.1,49.6) ; 124.762,49.362 cw(c125.1,49.024) v1@125.1,49.502 ; 162.445,48.907 cw(c163.316,48.037) microSD.2@163.316,49.268 ; 162.879,49.341 cw(c163.316,48.904) microSD.2@163.316,49.522
NetC18_2: C18.2 R3.1 | length 3.7
  Bottom Layer w0.254: C18.2@119.675,67.525 R3.1@121.275,67.525 ; C18.2@119.918,67.332 cw(c120.384,66.866) 120.384,67.525 cw(c120.384,68.184) C18.2@119.918,67.718 ; R3.1@121.032,67.332 ccw(c120.566,66.866) 120.566,67.525 ccw(c120.566,68.184) R3.1@121.032,67.718
NetC24_2: C24.2 U3.10 | length 4.3
  Top Layer w0.254: C24.2@144.3,54.8 144.7,54.8 145.625,55.725 U3.10@145.625,56.475 ; C24.2@144.35,54.819 ccw(c144.35,55.71) 144.98,55.08 ; C24.2@144.35,55.073 ccw(c144.35,56.577) 145.414,55.514
NetC25_2: C25.2 U3.20 | length 6.1
  Top Layer w0.254: C25.2@142.3,62.7 143.2,61.8 145.3,61.8 146.125,60.975 U3.20@146.125,60.425 ; C25.2@142.35,62.427 cw(c142.35,61.889) 142.731,62.269 ; C25.2@142.623,62.7 ccw(c143.403,62.7) 142.851,62.149